# Altium PCB backscatter_tag_pcb.PcbDoc
Units mil, origin at the board's own origin, x right, y up, seen from the top; angles counter-clockwise.
Board outline 2400 x 1370 mil, 4 copper layers (Top Layer, Signal Layer 1, Signal Layer 2, Bottom Layer), stack 30.634 mil thick; 63 components, 49 nets, 352 pads, 0 vias.
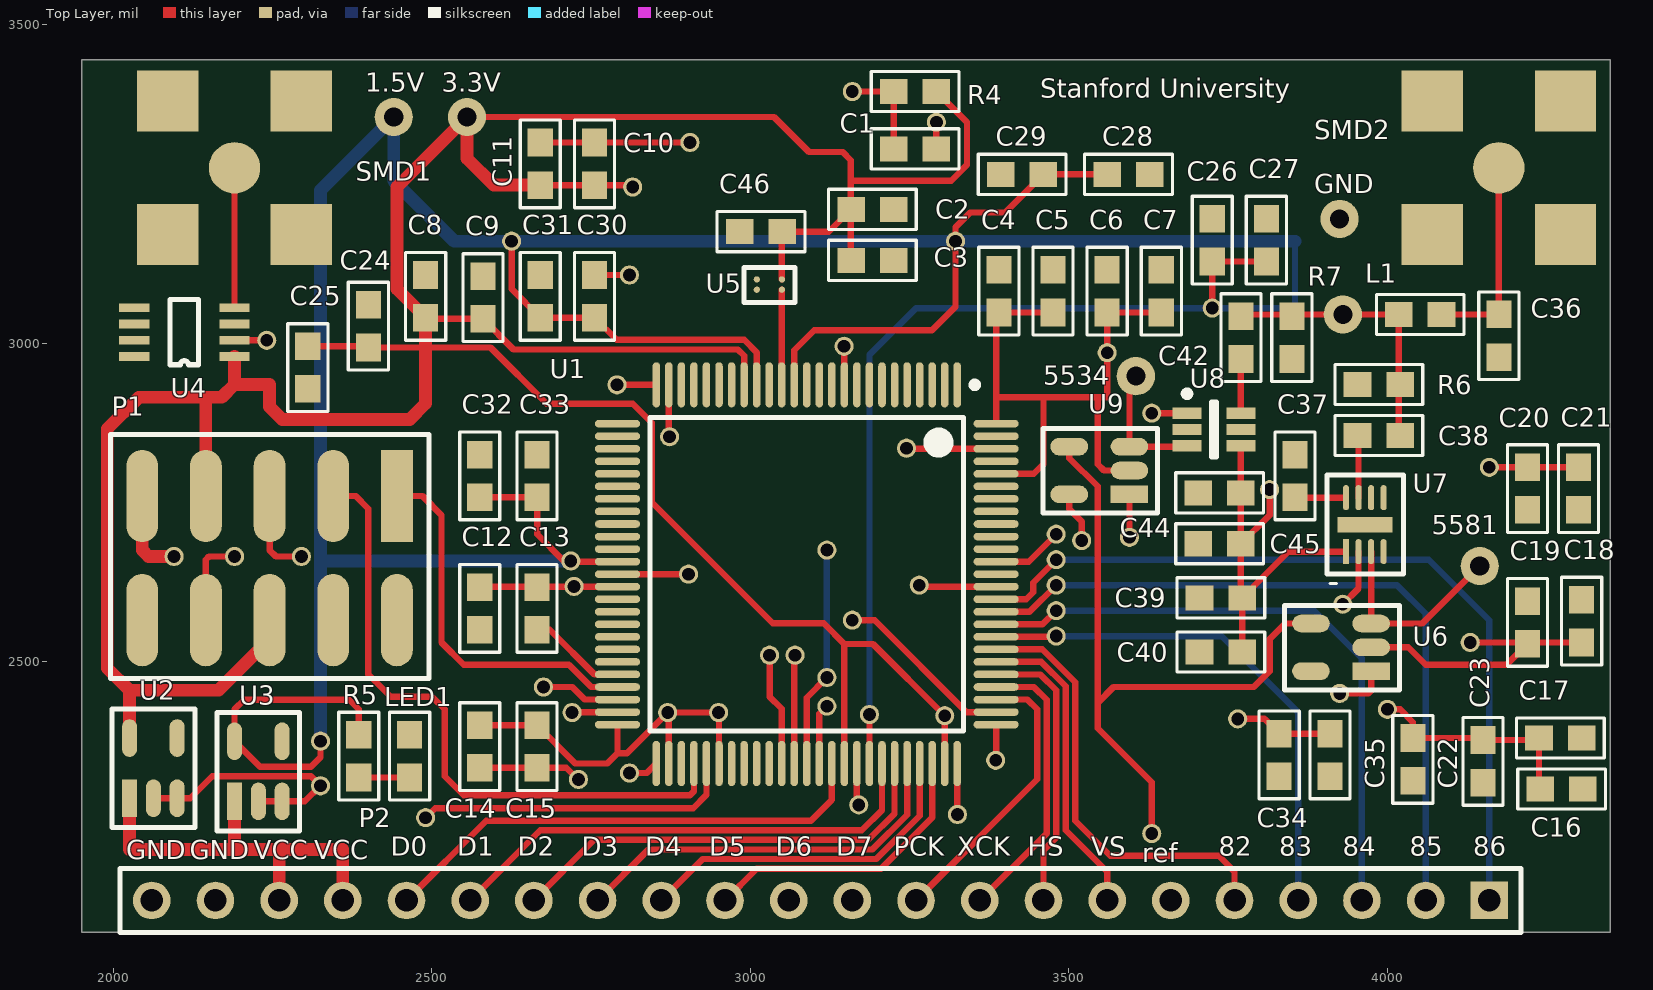
[diagram p0: Top Layer view]
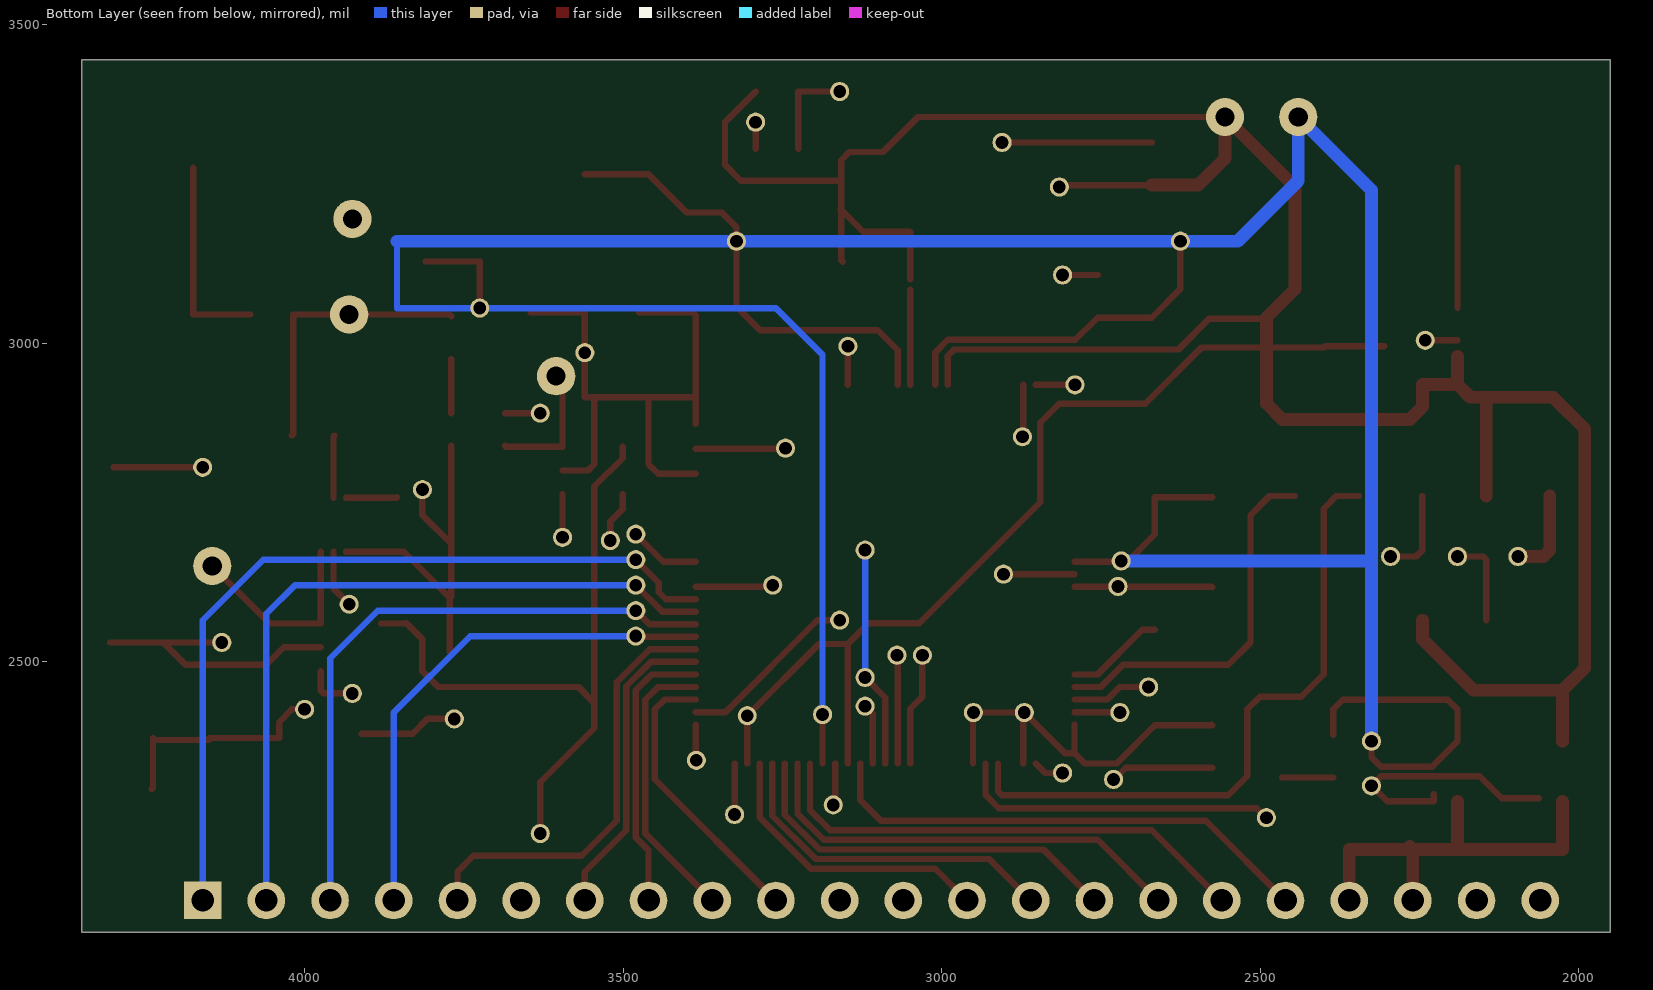
[diagram p1: Bottom Layer view, seen from below]
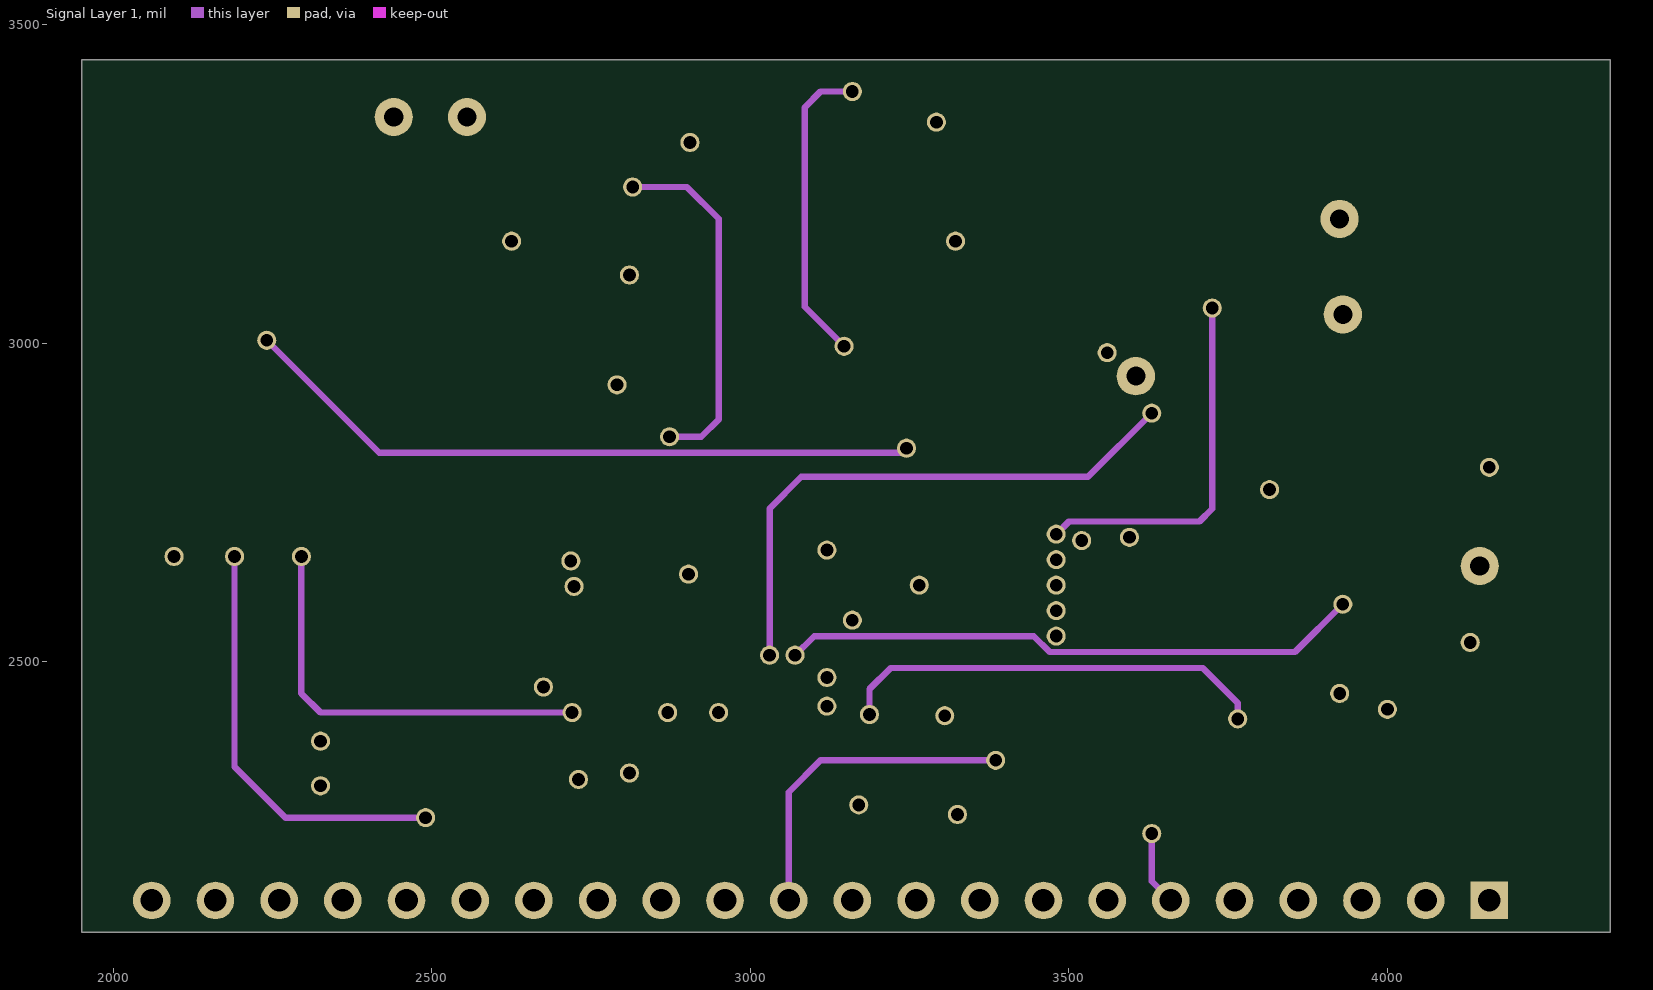
[diagram p2: Signal Layer 1]
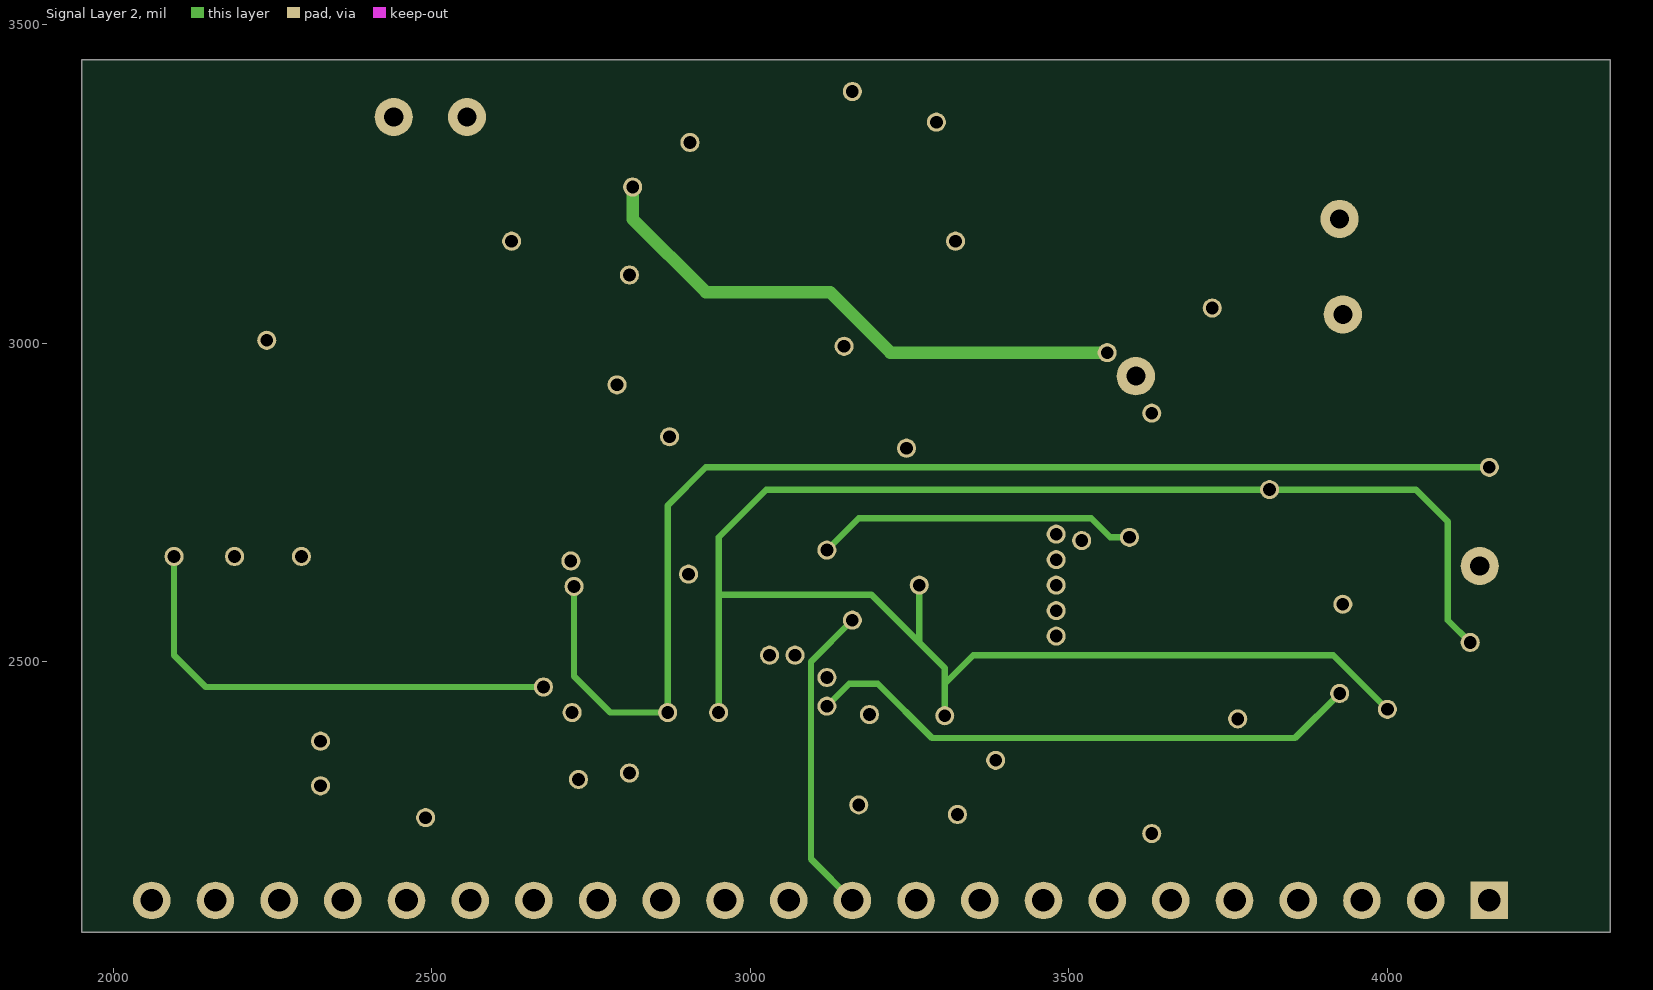
[diagram p3: Signal Layer 2]

## Layer stack, top to bottom
Top Solder: solder mask 0.4, Solder Resist, Dk 3.5
Top Layer: signal copper 1.4
Dielectric 1: core 10, FR-4, Dk 4.2
Signal Layer 1: signal copper 1.417
Dielectric 3: prepreg 5, Dk 4.2
Signal Layer 2: signal copper 1.417
Dielectric 2: core 10, Dk 4.2
Bottom Layer: signal copper 1.4
Bottom Solder: solder mask 0.4, Solder Resist, Dk 3.5

## Board outline
1950,2075 4350,2075 4350,3445 1950,3445

## Design rules (kind name [scope] priority, off if disabled: settings)
Clearance [All] p1: gap=5 ignorepadtopadclearanceinfootprint=FALSE except(6: THPad-THPad THPad-Via THPad-Fill THPad-Poly THPad-Region THPad-Text THPad-Hole Fill-Fill Fill-Poly Fill-Region Poly-Poly Poly-Region Region-Region)
PolygonConnect [All] p1: connectstyle=Relief reliefconductorwidth=10 reliefentries=4 polygonreliefangle="90 Angle" airgapwidth=10
RoutingVias [All] p1: holewidth=28 width=50 viastyle="Through Hole" minholewidth=28 minwidth=50 maxholewidth=28 maxwidth=50
SolderMaskExpansion [All] p1: expansion=4
Width [All] p1: maxlimit=20 minlimit=10 preferedwidth=10
30 further rules are at their usual default settings.

## Classes and differential pairs
component class envelope_detector: C36 C37 C38 C39 C40 C42 C44 C45 L1 R6 R7 SMD2 U6 U7 U8 U9
component class two_ant_fpga_board: C1 C2 C3 C4 C5 C6 C7 C8 C9 C10 C11 C12 C13 C14 C15 C16 C17 C18 C19 C20 C21 C22 C23 C24 C25 C26 C27 C28 C29 C30 C31 C32 C33 C34 C35 C46 LED1 P1 P2 R4 R5 SMD1 U1 U2 U3 U4 U5

## Components (designator, comment, footprint, x,y, rotation, side; value= is the part's Value field where it differs from the comment)
C1 "Cap" 0603 3291.93,3305 r180 top value=100nF
C2 "Cap" 0603 3225,3210 r180 top value=100nF
C3 "Cap" 0603 3225,3130 r180 top value=10nF
C4 "Cap" 0603 3390,3115 r270 top value=100nF
C5 "Cap" 0603 3475,3115 r270 top value=10nF
C6 "Cap" 0603 3560,3115 r270 top value=100nF
C7 "Cap" 0603 3645,3115 r270 top value=10nF
C8 "Cap" 0603 2490,3106.93 r270 top value=100nF
C9 "Cap" 0603 2580,3105 r270 top value=10nF
C10 "Cap" 0603 2755,3315 r270 top value=100nF
C11 "Cap" 0603 2670,3315 r270 top value=10nF
C12 "Cap" 0603 2575,2550 r90 top value=100nF
C13 "Cap" 0603 2665,2550 r90 top value=10nF
C14 "Cap" 0603 2575,2333.07 r90 top value=100nF
C15 "Cap" 0603 2665,2333.07 r90 top value=10nF
C16 "Cap" 0603 4306.93,2300 r180 top value=100nF
C17 "Cap" 0603 4305,2380 r180 top value=10nF
C18 "Cap" 0603 4305,2596.93 r270 top value=100nF
C19 "Cap" 0603 4220,2595 r270 top value=10nF
C20 "Cap" 0603 4220,2738.07 r90 top value=100nF
C21 "Cap" 0603 4300,2738.07 r90 top value=10nF
C22 "Cap" 0603 4040,2313.07 r90 top value=100nF
C23 "Cap" 0603 4150,2310 r90 top value=10nF
C24 "Cap" 0603 2400,3060 r270 top value=100nF
C25 "Cap" 0603 2305,2928.07 r90 top value=10nF
C26 "Cap" 0603 3725,3195 r270 top value=100nF
C27 "Cap" 0603 3810,3195 r270 top value=10nF
C28 "Cap" 0603 3626.93,3265 r180 top value=100nF
C29 "Cap" 0603 3393.07,3265 r0 top value=10nF
C30 "Cap" 0603 2755,3106.93 r270 top value=100nF
C31 "Cap" 0603 2670,3106.93 r270 top value=10nF
C32 "Cap" 0603 2575,2825 r270 top value=100nF
C33 "Cap" 0603 2665,2825 r270 top value=10nF
C34 "Cap" 0603 3830,2320 r90 top value=100nF
C35 "Cap" 0603 3910,2320 r90 top value=10nF
C36 "Cap" 0603 4175,2978.07 r90 top value=1nF
C37 "Cap" 0603 3855,2825 r270 top value=0.01uF
C38 "Cap" 0603 3953.07,2855 r0 top value=1nF
C39 "Cap" 0603 3705,2600 r0 top value=0.1uF
C40 "Cap" 0603 3705,2515 r0 top value=100pF
C42 "Cap" 0603 3770,2975 r90 top value=1nF
C44 "Cap" 0603 3703.07,2765 r0 top value=100nF
C45 "Cap" 0603 3703.07,2685 r0 top value=10nF
C46 "Cap" 0603 2983.07,3175 r0 top value=0.01uF
L1 "Ind" 0603 4018.07,3045 r0 top value=10nH
LED1 "LED" 0603 2465,2318.07 r90 top
P1 "header_10_pad" header_10_pad 2445,2759.88 r270 top
P2 "Header 22" HDR1X22 4160,2125 r180 top
R4 "Res" 0603 3225,3395 r0 top value=1k
R5 "Res" 0603 2385,2318.07 r90 top value=1k
R6 "Res" 0603 3953.07,2935 r0 top value=68O
R7 "Res" 0603 3850,2975 r90 top value=47O
SMD1 "SMD" SMD 2085.28,3380 r0 top
SMD2 "SMD" SMD 4070.28,3380 r0 top
U1 "AGLN250V2-VQ100" VQ100_N 3088.43,2637.24 r270 top
U2 "TPS76933" TPS73633 2025.2,2285.51 r90 top
U3 "TPS76915" TPS73633 2190,2280.51 r90 top
U4 "adg902" ADG902 2190,2978.82 r180 top
U5 "SiT8021" SiT8021 3010,3083.86 r90 top
U6 "NCS2200A" NCS2200 3974.49,2485 r180 top
U7 "LT5581" LT5581 3935,2672.68 r90 top
U8 "LT5534" LT5534 3727.68,2864.41 r0 top
U9 "NCS2200A" NCS2200 3595,2762.6 r180 top

## Footprints (in the part's own frame and the unit in brackets; to place one, negate y for a bottom-side part, rotate by r counter-clockwise, add the part's x,y. Pads: shape width x height; smd on the part's side, far side on the other; paste and mask are expansions set on the pad)
0603 [mm]
  rect 1.1x1 smd: 1(0,0) 2(1.7,0)
  silkscreen extent -0.9,-0.8 2.6,0.8
ADG902 [mm]
  rect 1.2x0.35 smd: 1(0,0) 2(0,-0.65) 3(0,-1.3) 4(0,-1.95) 5(4,-1.95) 6(4,-1.3) 7(4,-0.65) 8(4,0)
  silkscreen extent 1.43,-2.28 2.57,0.33
HDR1X22 [mm] "Connector; Header; 22 Position"
  rect 1.5x1.5 hole 0.9: 1(0,0)
  round 1.5 hole 0.9: 2(2.54,0) 3(5.08,0) 4(7.62,0) 5(10.16,0) 6(12.7,0) 7(15.24,0) 8(17.78,0) 9(20.32,0) 10(22.86,0) 11(25.4,0) 12(27.94,0) 13(30.48,0) 14(33.02,0) 15(35.56,0) 16(38.1,0) 17(40.64,0) 18(43.18,0) 19(45.72,0) 20(48.26,0) 21(50.8,0) 22(53.34,0)
  silkscreen extent -1.27,-1.27 54.61,1.27
header_10_pad [mm]
  rect 3.68x1.27 smd: 1(0,0)
  oval 3.68x1.27 smd: 2(4.95,0) 3(0,-2.54) 4(4.95,-2.54) 5(0,-5.08) 6(4.95,-5.08) 7(0,-7.62) 8(4.95,-7.62) 9(0,-10.16) 10(4.95,-10.16)
  silkscreen extent -2.45,-11.43 7.27,1.27
LT5534 [mm] "SOT23, 6-Leads, Body 2.00x2.55mm, Pitch 0.65mm, IPC Medium Density"
  rect 1.15x0.45 smd: 1(-1.075,0.65) 2(-1.075,0) 3(-1.075,-0.65) 4(1.075,-0.65) 5(1.075,0) 6(1.075,0.65)
  silkscreen extent -1.2,-1.1 0.1,1.55, body extent -0.67,-1.1 0.67,1.1, height 1.1
LT5581 [mm]
  rect 1x0.25 smd: 1(0,0)
  oval 1x0.25 smd: 2(0,-0.5) 3(0,-1) 4(0,-1.5) 5(2.15,-1.5) 6(2.15,-1) 7(2.15,-0.5) 8(2.15,0)
  rect 0.61x2.2 smd: 9(1.075,-0.762)
  silkscreen extent -1.27,-2.29 3.05,0.76
NCS2200 [mm]
  rect 1.5x0.7 smd: 1(0,0)
  oval 1.5x0.7 smd: 2(0,-0.95) 3(0,-1.9) 4(2.4,-1.9) 5(2.4,0)
  silkscreen extent -1.12,-2.63 3.45,0.75
SiT8021 [mm]
  round 0.25 smd: 1(0,0) 2(0,-1) 3(0.41,-1) 4(0.41,0)
  silkscreen extent -0.51,-1.52 0.89,0.51
SMD [mm]
  rect 2.44x2.44 smd: 1(0,-5.32) 1(0,0) 1(5.32,-5.32) 1(5.32,0)
  round 2.05 smd: 2(2.66,-2.66)
TPS73633 [mm]
  rect 1.5x0.6 smd: 1(0,0)
  oval 1.5x0.6 smd: 2(0,-0.95) 3(0,-1.9) 4(2.4,-1.9) 5(2.4,0)
  silkscreen extent -1.17,-2.6 3.55,0.7
VQ100_N [mm] "Thin QFP, 100-Leads, Body 14x14mm, Pitch 0.5mm, IPC Medium Density"
  oval 1.8x0.3 smd: 1(-7.55,6) 2(-7.55,5.5) 3(-7.55,5) 4(-7.55,4.5) 5(-7.55,4) 6(-7.55,3.5) 7(-7.55,3) 8(-7.55,2.5) 9(-7.55,2) 10(-7.55,1.5) 11(-7.55,1) 12(-7.55,0.5) 13(-7.55,0) 14(-7.55,-0.5) 15(-7.55,-1) 16(-7.55,-1.5) 17(-7.55,-2) 18(-7.55,-2.5) 19(-7.55,-3) 20(-7.55,-3.5) 21(-7.55,-4) 22(-7.55,-4.5) 23(-7.55,-5) 24(-7.55,-5.5) 25(-7.55,-6) 51(7.55,-6) 52(7.55,-5.5) 53(7.55,-5) 54(7.55,-4.5) 55(7.55,-4) 56(7.55,-3.5) 57(7.55,-3) 58(7.55,-2.5) 59(7.55,-2) 60(7.55,-1.5) 61(7.55,-1) 62(7.55,-0.5) 63(7.55,0) 64(7.55,0.5) 65(7.55,1) 66(7.55,1.5) 67(7.55,2) 68(7.55,2.5) 69(7.55,3) 70(7.55,3.5) 71(7.55,4) 72(7.55,4.5) 73(7.55,5) 74(7.55,5.5) 75(7.55,6)
  oval 0.3x1.8 smd: 26(-6,-7.55) 27(-5.5,-7.55) 28(-5,-7.55) 29(-4.5,-7.55) 30(-4,-7.55) 31(-3.5,-7.55) 32(-3,-7.55) 33(-2.5,-7.55) 34(-2,-7.55) 35(-1.5,-7.55) 36(-1,-7.55) 37(-0.5,-7.55) 38(0,-7.55) 39(0.5,-7.55) 40(1,-7.55) 41(1.5,-7.55) 42(2,-7.55) 43(2.5,-7.55) 44(3,-7.55) 45(3.5,-7.55) 46(4,-7.55) 47(4.5,-7.55) 48(5,-7.55) 49(5.5,-7.55) 50(6,-7.55) 76(6,7.55) 77(5.5,7.55) 78(5,7.55) 79(4.5,7.55) 80(4,7.55) 81(3.5,7.55) 82(3,7.55) 83(2.5,7.55) 84(2,7.55) 85(1.5,7.55) 86(1,7.55) 87(0.5,7.55) 88(0,7.55) 89(-0.5,7.55) 90(-1,7.55) 91(-1.5,7.55) 92(-2,7.55) 93(-2.5,7.55) 94(-3,7.55) 95(-3.5,7.55) 96(-4,7.55) 97(-4.5,7.55) 98(-5,7.55) 99(-5.5,7.55) 100(-6,7.55)
  silkscreen extent -7.67,-6.25 6.25,6.83, body extent -7,-7 7,7, height 1.2

## Part data
C1 C2 C3 C4 C5 C6 C7 C8 C9 C10 C11 C12 C13 C14 C15 C16 C17 C18 C19 C20 C21 C22 C23 C24 C25 C26 C27 C28 C29 C30 C31 C32 C33 C34 C35 C36 C37 C38 C39 C40 C42 C44 C45 C46: "Ceramic Capacitor (Surface Mount)", Manufacturer="Generic Ceramic Chip Cap (TBD)"
L1: "Inductor (Surface Mount)"
P2: "Header, 22-Pin", LatestRevisionDate=17-Jul-2002, LatestRevisionNote="Re-released for DXP Platform.", Publisher="Altium Limited"
R4 R5 R6 R7: "Chip Resistor (Surface Mount)", Manufacturer="Generic Chip Res (TBD)"
U1: "IGLOO nano Low-Power Flash 1.2 to 1.5V FPGA with Flash*Freeze, 68 User IOs, 250K System Gates, 1Kbit Flash ROM, 100-Pin TQFP, Commercial Grade", Code_JEDEC=MS-026-AED, ComponentLink1Description="IGLOO nano Datasheet", ComponentLink1URL=http://www.actel.com/documents/IGLOO_nano_DS.pdf, ComponentLink2Description="Package Mechanical Drawings", ComponentLink2URL=http://www.actel.com/documents/PckgMechDrwngs.pdf, ComponentLink3Description="IGLOO nano Documents", ComponentLink3URL=http://www.actel.com/products/igloonano/docs.aspx, ComponentLink4Description="Actel.com Home", ComponentLink4URL=http://www.actel.com/, DatasheetVersion="v0.8, Jan-2010", LatestRevisionDate=26-Feb-2010, LatestRevisionNote="Updated to datasheet version 0.8 Jan-2010.", PackageDescription="100-Pin Plastic Quad Flat Pack (VQ100)", PackageReference=VQ100, PackageVersion="ver11.2, Nov-2009", Published=29-May-2009, Publisher="Altium Limited"
U2 U3: "TPS73633"

## Free pads (board coordinates)
  round 30 hole 20: 10(2095,2665) 10(2190,2665) 10(2240.59,3004.41) 10(2295,2665) 10(2325,2305) 10(2325,2375) 10(2490,2255) 10(2625,3160) 10(2675,2460) 10(2718,2658) 10(2720,2420) 10(2723,2618) 10(2730,2315) 10(2790.51,2934.49) 10(2810,2325) 10(2810,3106.93) 10(2815,3245) 10(2870,2420) 10(2873,2853) 10(2902.76,2637.24) 10(2905,3315) 10(2950,2420) 10(3147,2995) 10(3160,3395) 10(3170,2275) 10(3245,2835) 10(3291.93,3346.93) 10(3322,3160) 10(3560,2985) 10(3725,3055) 10(4130,2530) 10(4160,2805) 11(3030,2510) 11(3070,2510) 11(3120,2430) 11(3120,2475) 11(3120,2675) 11(3160,2565) 11(3186.85,2416.85) 11(3265,2620) 11(3305,2415) 11(3325,2260) 11(3385,2345) 11(3480,2540) 11(3480,2580) 11(3480,2620) 11(3480,2660) 11(3480,2700) 11(3520,2690) 11(3595,2695) 11(3630,2230) 11(3630,2890) 11(3765,2410) 11(3815,2770) 11(3925,2450) 11(3930,2590) 11(4000,2425)
  round 60 hole 30: 12(2440,3355) 13(2555,3355) 14(3930,3045) 15(3925,3195) 16(3605,2948.07) 16(4145,2650)

## Nets (pads, with @x,y where several pads share a name; then routed paths per layer and width w, separated by ;. In a path a pad name is that pad's centre, name@x,y a point inside that pad or via, vN(x,y) a via of type N, cw(c..) or ccw(c..) an arc to the next point about the centre after c; other vN are vias at no path point)
comp_out_LT5534: pad.11@3120,2475 pad.11@3120,2675 pad.11@3595,2695 U1.63 U9.1 | length 923.8
  Top Layer w10: U1.63 3088.43,2443.43 pad.11@3120,2475 ; pad.11@3595,2695 U9.1
  Signal Layer 2 w10: pad.11@3120,2675 3170,2725 3535,2725 3565,2695 pad.11@3595,2695
  Bottom Layer w10: pad.11@3120,2475 pad.11@3120,2675
comp_out_LT5581: pad.11@3120,2430 pad.11@3925,2450 U1.64 U6.1 | length 1060.5
  Top Layer w10: U1.64 3108.11,2418.11 pad.11@3120,2430 ; pad.11@3925,2450 3970,2450 3974.49,2454.49 U6.1
  Signal Layer 2 w10: pad.11@3120,2430 3155,2465 3200,2465 3285,2380 3855,2380 pad.11@3925,2450
data: pad.10@2240.59,3004.41 pad.10@3245,2835 U1.98 U4.2 | length 1276.1
  Top Layer w10: U4.2 pad.10@2240.59,3004.41 ; pad.10@3245,2835 3245.91,2834.09 U1.98
  Signal Layer 1 w10: pad.10@2240.59,3004.41 2417,2828 3245,2828 pad.10@3245,2835
EN_LT5534: pad.11@3030,2510 pad.11@3630,2890 U1.61 U8.1 | length 1125.4
  Top Layer w10: pad.11@3030,2510 3030,2445 3049.06,2425.94 U1.61 ; pad.11@3630,2890 U8.1
  Signal Layer 1 w10: pad.11@3030,2510 3030,2740 3080,2790 3530,2790 pad.11@3630,2890
EN_LT5581: pad.11@3070,2510 pad.11@3930,2590 U1.62 U7.2 | length 1177.3
  Top Layer w10: U1.62 3068.74,2508.74 pad.11@3070,2510 ; pad.11@3930,2590 3954.68,2614.68 U7.2
  Signal Layer 1 w10: pad.11@3070,2510 3100,2540 3444.64,2540 3469.64,2515 3855,2515 pad.11@3930,2590
FPGA_D0: P2.18 U1.65 | length 790.4
  Top Layer w10: P2.18 2585,2250 3095,2250 3127.8,2282.8 U1.65
FPGA_D1: P2.17 U1.69 | length 778.6
  Top Layer w10: P2.17 2670,2235 3175,2235 3206.54,2266.54 U1.69
FPGA_D2: P2.16 U1.70 | length 701.4
  Top Layer w10: P2.16 2755,2220 3185,2220 3226.22,2261.22 U1.70
FPGA_D3: P2.15 U1.71 | length 622
  Top Layer w10: P2.15 2840,2205 3191.21,2205 3245.91,2259.69 U1.71
FPGA_D4: P2.14 U1.72 | length 542.6
  Top Layer w10: P2.14 2925,2190 3197.43,2190 3265.59,2258.16 U1.72
FPGA_D5: P2.13 U1.73 | length 464
  Top Layer w10: P2.13 3010,2175 3205,2175 3285.28,2255.28 U1.73
FPGA_D6: P2.12 pad.11@3385,2345 U1.76 | length 572
  Top Layer w10: pad.11@3385,2345 3385.67,2345.67 U1.76
  Signal Layer 1 w10: P2.12 3060,2295 3110,2345 pad.11@3385,2345
FPGA_D7: P2.11 pad.11@3160,2565 U1.77 | length 779.3
  Top Layer w10: pad.11@3160,2565 3195,2565 3339.29,2420.71 U1.77
  Signal Layer 2 w10: P2.11 3095,2190 3095,2500 pad.11@3160,2565
FPGA_HS: P2.8 U1.80 | length 442.9
  Top Layer w10: U1.80 3455.24,2479.76 3480,2455 3480,2223.79 3460,2203.79 P2.8
FPGA_PCK: P2.10 U1.78 | length 449.4
  Top Layer w10: P2.10 3450,2315 3450,2425 3434.61,2440.39 U1.78
FPGA_VS: P2.7 U1.81 | length 488.3
  Top Layer w10: U1.81 3456.76,2499.45 3495,2461.21 3495,2235 3560,2170 P2.7
FPGA_XCK: P2.9 U1.79 | length 446.1
  Top Layer w10: P2.9 3465,2230 3465,2440 3444.92,2460.08 U1.79
GND: C1.1 C2.1 C3.1 C4.1 C5.1 C6.1 C7.1 C8.1 C9.1 C10.1 C11.1 C12.1 C13.1 C14.1 C15.1 C16.1 C17.1 C18.1 C19.1 C20.1 C21.1 C22.1 C23.1 C24.1 C25.1 C26.1 C27.1 C28.1 C29.1 C30.1 C31.1 C32.1 C33.1 C34.1 C35.1 C36.1 C37.1 C39.1 C40.1 C44.1 C45.1 C46.1 LED1.2 P1.2 P1.10 P2.21 P2.22 pad.10@2325,2305 pad.10@2730,2315 pad.10@2790.51,2934.49 pad.10@2810,2325 pad.10@2810,3106.93 pad.10@2902.76,2637.24 pad.10@2905,3315 pad.10@3170,2275 pad.10@3291.93,3346.93 pad.11@3325,2260 pad.11@3520,2690 pad.15 R6.1 R7.1 SMD1.1 SMD2.1 U1.1 U1.9 U1.12 U1.25 U1.38 U1.46 U1.51 U1.67 U1.75 U1.88 U1.99 U2.2 U2.3 U3.2 U3.3 U4.3 U4.5 U4.6 U4.7 U4.8 U5.1 U5.4 U6.5 U7.4 U7.5 U7.6 U7.9 U8.2 U8.5 U9.5 | length 1503.3
  Top Layer w10: U2.2 U2.3 2120.51,2285.51 2155.04,2320.04 2223.75,2320.04 2223.79,2320 2310,2320 2325,2305 2300.51,2280.51 U3.3 U3.2 U3.2@2227.4,2291.67 ; C14.1 C15.1 2710.72,2333.07 2728.79,2315 pad.10@2730,2315 ; C13.1 2685,2550 2755.24,2479.76 U1.46 ; C11.1 C10.1 pad.10@2905,3315 ; C30.1 pad.10@2813.07,3106.93 ; pad.10@2790.51,2934.49 U1.25 ; U1.38 pad.10@2902.76,2637.24 ; pad.10@2810,2325 2837.2,2325 U1.51 ; U1.67 3167.17,2277.83 pad.10@3170,2275 ; C1.1 pad.10@3291.93,3346.93 ; U1.75 3324.65,2260.35 pad.11@3325,2260 ; U9.5 3500.51,2739.49 3520,2720 pad.11@3520,2690
NetC36_2: C36.2 L1.2 SMD2.2 | length 320.3
  Top Layer w10: L1.2 C36.2 SMD2.2
NetC37_2: C37.2 U7.8 | length 80.3
  Top Layer w10: C37.2 3855.75,2757.32 U7.8
NetC38_1: C38.1 U7.7 | length 98.3
  Top Layer w10: C38.1 3954.68,2853.39 U7.7
NetC38_2: C38.2 C42.2 L1.1 pad.14 R6.2 R7.2 | length 440.1
  Top Layer w10: C42.2 3773.07,3045 pad.14 L1.1 4018.07,2856.93 C38.2
NetC42_1: C42.1 U8.6 | length 85
  Top Layer w10: U8.6 C42.1
NetLED1_1: LED1.1 R5.1 | length 80
  Top Layer w10: R5.1 LED1.1
NetSMD1_2: SMD1.2 U4.4 | length 219.7
  Top Layer w10: U4.4 SMD1.2
OSC: U1.15 U5.2 | length 149.5
  Top Layer w10: U1.15 3049.41,2934.84 3049.41,3035 3049.37,3035.04 U5.2
P82: P2.5 U1.82 | length 691.3
  Top Layer w10: U1.82 3458.29,2519.13 3510,2467.43 3510,2250 3565,2195 3735,2195 3760,2170 P2.5
P83: P2.4 pad.11@3480,2540 U1.83 | length 819.5
  Top Layer w10: U1.83 3478.82,2538.82 pad.11@3480,2540
  Bottom Layer w10: pad.11@3480,2540 3740,2540 3860,2420 P2.4
P84: P2.3 pad.11@3480,2580 U1.84 | length 994.3
  Top Layer w10: U1.84 3458.5,2558.5 pad.11@3480,2580
  Bottom Layer w10: pad.11@3480,2580 3885,2580 3960,2505 P2.3
P85: P2.2 pad.11@3480,2620 U1.85 | length 1160.3
  Top Layer w10: U1.85 3438.19,2578.19 pad.11@3480,2620
  Bottom Layer w10: pad.11@3480,2620 4015,2620 4060,2575 P2.2
P86: P2.1 pad.11@3480,2660 U1.86 | length 1288.2
  Top Layer w10: U1.86 3432.87,2597.87 3443.94,2608.94 3443.94,2623.94 pad.11@3480,2660
  Bottom Layer w10: pad.11@3480,2660 4065,2660 4160,2565 P2.1
P90: U1.90
P91: U1.91
P92: U1.92
P93: U1.93
P94: U1.94
P95: U1.95
ref_voltage: P2.6 pad.11@3630,2230 U6.4 U9.4 | length 1194.6
  Top Layer w10: U9.4 3500.51,2819.49 3545,2775 3545,2435 ; pad.11@3630,2230 3630,2310.51 3545,2395.51 3545,2435 ; U6.4 3840.2,2559.8 3840,2560 3815,2535 3815,2485 3790,2460 3570,2460 3545,2435
  Signal Layer 1 w10: pad.11@3630,2230 3630,2155 P2.6
reset: C1.2 pad.10@3147,2995 pad.10@3160,3395 R4.1 U1.10 | length 701.7
  Top Layer w10: pad.10@3147,2995 3147.48,2994.52 U1.10 ; pad.10@3160,3395 R4.1 C1.2
  Signal Layer 1 w10: pad.10@3147,2995 3085,3057 3085,3370 3110,3395 pad.10@3160,3395
RSS_LT5534: pad.16@3605,2948.07 U8.3 U9.3 | length 205.8
  Top Layer w10: pad.16@3605,2948.07 3595,2938.07 U9.3 3683.94,2837.4 U8.3
RSS_LT5581: pad.16@4145,2650 U6.3 U7.3 | length 320.8
  Top Layer w10: U7.3 3974.37,2559.92 U6.3 4054.8,2559.8 pad.16@4145,2650
TCK: P1.1 U1.47 | length 587.5
  Top Layer w10: P1.1 2485.12,2759.88 2515,2730 2515,2530 2550,2495 2715,2495 2749.92,2460.08 U1.47
TDI: P1.9 pad.10@2095,2665 pad.10@2675,2460 U1.48 | length 1019
  Top Layer w10: pad.10@2675,2460 2720,2460 2739.61,2440.39 U1.48
  Top Layer w20: P1.9 2045,2675 2055,2665 pad.10@2095,2665
  Signal Layer 2 w10: pad.10@2095,2665 2095,2510 2145,2460 pad.10@2675,2460
TDO: P1.3 U1.54 | length 1021
  Top Layer w10: P1.3 2380.12,2759.88 2400,2740 2400,2480 2435,2445 2500,2445 2520,2425 2520,2320 2550,2290 2905,2290 2911.26,2296.26 U1.54
TMS: P1.5 pad.10@2295,2665 pad.10@2720,2420 U1.49 | length 862.9
  Top Layer w10: P1.5 2245,2675 2255,2665 pad.10@2295,2665 ; pad.10@2720,2420 2720.71,2420.71 U1.49
  Signal Layer 1 w10: pad.10@2295,2665 2295,2450 2325,2420 pad.10@2720,2420
TRST: P1.8 pad.10@2190,2665 pad.10@2490,2255 U1.55 | length 1310.1
  Top Layer w10: P1.8 2145,2660 2150,2665 pad.10@2190,2665 ; pad.10@2490,2255 2505,2270 2910,2270 2930.94,2290.94 U1.55
  Signal Layer 1 w10: pad.10@2190,2665 2190,2335 2270,2255 pad.10@2490,2255
VCC: P2.19 P2.20 U2.1 U3.1 | length 653.1
  Top Layer w20: U2.1@2025,2280.51 2025,2205 2100,2205 ; 2099.8,2205.2 2100,2205 ; U3.1 2190,2205 ; P2.20 2260,2205 ; 2264.8,2209.8 2260,2205 ; P2.19 2360,2205 2260,2205 ; 2100,2205 2190,2205 ; 2190,2205 2260,2205
VCC_1_5: C26.2 C27.2 C28.2 C29.2 C30.2 C31.2 C32.2 C33.2 C34.2 C35.2 pad.10@2325,2375 pad.10@2625,3160 pad.10@2718,2658 pad.10@3322,3160 pad.10@3725,3055 pad.11@3186.85,2416.85 pad.11@3480,2700 pad.11@3765,2410 pad.12 R5.2 U1.14 U1.17 U1.37 U1.68 U1.89 U3.5 | length 8159.9
  Top Layer w10: pad.10@2325,2375 2325,2350 2310,2335 2280.09,2335 2280.05,2335.04 2249.56,2335.04 2249.52,2335 2230,2335 U3.5 2190,2425 2205,2440 2370,2440 2385,2425 R5.2 ; C32.2 C33.2 2665,2700 2708.07,2656.93 U1.37 ; pad.10@2625,3160 2625,3085 C31.2 C30.2 2790,3005 2990,3005 3009.68,2985.32 U1.17 ; U1.14 3068.74,2988.74 3100,3020 3285,3020 3322,3057 3322,3160 3322,3182 3345,3205 3400,3205 C29.2 C28.2 ; U1.68 pad.11@3186.85,2416.85 ; U1.89 3436.93,2656.93 pad.11@3480,2700 ; pad.10@3725,3055 C26.2 C27.2 ; pad.11@3765,2410 3806.93,2410 C34.2 C35.2
  Signal Layer 1 w10: pad.11@3186.85,2416.85 3186.85,2456.85 3220,2490 3710,2490 3765,2435 pad.11@3765,2410 ; pad.11@3480,2700 3500,2720 3705,2720 3725,2740 pad.10@3725,3055
  Bottom Layer w10: pad.11@3186.85,2416.85 3186.85,2981.85 3260,3055 3725,3055 3855,3055 3855,3160
  Bottom Layer w20: pad.10@2325,2375 2325,2655 ; pad.10@2718,2658 2328,2658 2325,2655 ; 3855,3160 3322,3160 2625,3160 2535,3160 2440,3255 pad.12 2325,3240 2325,2655
VCC_3_3: C2.2 C3.2 C4.2 C5.2 C6.2 C7.2 C8.2 C9.2 C10.2 C11.2 C12.2 C13.2 C14.2 C15.2 C16.2 C17.2 C18.2 C19.2 C20.2 C21.2 C22.2 C23.2 C24.2 C25.2 C39.2 C40.2 C44.2 C45.2 C46.2 P1.6 P1.7 pad.10@2723,2618 pad.10@2815,3245 pad.10@2870,2420 pad.10@2873,2853 pad.10@2950,2420 pad.10@3560,2985 pad.10@4130,2530 pad.10@4160,2805 pad.11@3265,2620 pad.11@3305,2415 pad.11@3815,2770 pad.11@4000,2425 pad.13 R4.2 U1.18 U1.24 U1.39 U1.50 U1.52 U1.56 U1.66 U1.74 U1.87 U1.96 U1.100 U2.5 U4.1 U5.3 U6.2 U7.1 U8.4 U9.2 | length 15894.8
  Top Layer w10: C25.2 2398.07,2995 C24.2 2490,2993.07 2591.93,2993.07 2680,2905 2815,2905 2845,2875 2845,2750 3035,2560 3115,2560 3147.48,2527.52 ; C8.2 2491.93,3038.07 C9.2 2628.07,2990 2980,2990 2990,2980 U1.18 ; pad.13 3036.93,3355 3091.93,3300 3145,3300 3157.72,3287.28 3157.72,3255 ; C12.2 2575.63,2617.56 U1.39 ; C14.2@2576.02,2401.02 C14.2 C15.2 2725,2340 2775,2340 2791.18,2356.18 ; C11.2 C10.2 2811.93,3248.07 pad.10@2815,3245 ; U1.50 2791.18,2356.18 ; U1.52 2871.89,2418.11 pad.10@2870,2420 ; U1.24 2871.89,2854.11 pad.10@2873,2853 ; U1.56 2950.63,2419.37 2950,2420 pad.10@2870,2420 ; U5.3 3049.37,3174.37 C46.2 3123.07,3175 C2.2@3157.72,3209.65 ; U1.66 3147.48,2527.52 ; C3.2@3155,3127.64 3157.72,3130.35 C2.2@3157.72,3209.65 ; C2.2 C2.2@3157.72,3209.65 ; pad.11@3265,2620 3267.44,2617.56 U1.87 ; R4.2 3340,3346.93 3340,3280 3315,3255 3157.72,3255 ; U1.74 pad.11@3304.96,2414.96 ; pad.11@3305,2415 3192.48,2527.52 3147.48,2527.52 ; U1.96 3444.72,2794.72 3460,2810 3460,2915 ; U1.100 3385.67,2915 ; C5.2 C4.2 3385.67,3043.74 3385.67,2915 ; U9.2 3555,2800 3545,2810 3545,2915 ; C7.2 C6.2 3560,2985 3560,2915 3545,2915 ; U8.4 C44.2 C45.2 ; C40.2 C39.2 ; pad.11@3815,2770 3815,2730 C45.2 ; U7.1 3844.61,2672.68 C39.2 ; U6.2 4032.6,2522.4 4060,2495 4186.93,2495 C19.2 ; pad.11@4000,2425 4020,2425 4040,2405 C22.2 C23.2@4150,2380 ; pad.10@4130,2530 C18.2 ; C23.2 4235,2376.93 C17.2 4238.07,2301.93 C16.2 ; pad.10@4160,2805 C20.2 C21.2 ; 2791.18,2356.18 2806.18,2356.18 pad.10@2870,2420 ; C2.2@3157.72,3209.65 3157.72,3255 ; 3385.67,2915 3460,2915 ; 3460,2915 3545,2915 ; C45.2 3770,2601.93 C39.2
  Top Layer w20: U2.5@2025,2375 2025,2455 ; P1.7 2145,2915 ; U4.1 2190,2935 ; P1.6 2245,2535 2165,2455 2025,2455 ; C11.2 2596.93,3248.07 2555,3290 pad.13 2445,3245 2445,3085 C8.2 2490,2993.07 2490,2905 2465,2880 2265,2880 2245,2900 2245,2935 2190,2935 ; 2025,2455 1990,2490 1990,2865 2040,2915 2145,2915 ; 2145,2915 2170,2915 2190,2935
  Signal Layer 1 w10: pad.10@2815,3245 2900,3245 2950,3195 2950,2880 2923,2853 pad.10@2873,2853
  Signal Layer 2 w10: pad.10@2723,2618 2723,2477 2780,2420 2870,2420 2870,2745 2930,2805 pad.10@4160,2805 ; pad.10@2950,2420 2950,2605 ; pad.11@3265,2620 3265,2530 ; pad.11@3305,2415 3305,2465 ; pad.11@4000,2425 3915,2510 3350,2510 3305,2465 ; pad.10@4130,2530 4095,2565 4095,2720 4045,2770 3815,2770 3025,2770 2950,2695 2950,2605 ; 2950,2605 3190,2605 3265,2530 ; 3265,2530 3305,2490 3305,2465
  Signal Layer 2 w20: pad.10@2815,3245 2815,3195 2930,3080 3125,3080 3220,2985 pad.10@3560,2985
pads on no net: P1.4 U1.2 U1.3 U1.4 U1.5 U1.6 U1.7 U1.8 U1.11 U1.13 U1.16 U1.19 U1.20 U1.21 U1.22 U1.23 U1.26 U1.27 U1.28 U1.29 U1.30 U1.31 U1.32 U1.33 U1.34 U1.35 U1.36 U1.40 U1.41 U1.42 U1.43 U1.44 U1.45 U1.53 U1.57 U1.58 U1.59 U1.60 U1.97 U2.4 U3.4

## Silkscreen, mask and mechanical layers (free items; w line width, h text height)
Top Overlay:
  text "1.5V" at 2395,3395 h30
  text "3.3V" at 2515,3395 h30
  text "Stanford University" at 3455,3385 h30
  text "GND" at 3885,3235 h30
  text "5534" at 3460,2935 h30
  text "5581" at 4070,2700 h30
  text "D0" at 2435,2195 h30
  text "D1" at 2540,2195 h30
  text "D2" at 2635,2195 h30
  text "D3" at 2735,2195 h30
  text "D4" at 2835,2195 h30
  text "D5" at 2935,2195 h30
  text "D6" at 3040,2195 h30
  text "D7" at 3135,2195 h30
  text "PCK" at 3225,2195 h30
  text "XCK" at 3325,2195 h30
  text "HS" at 3435,2195 h30
  text "VS" at 3535,2195 h30
  text "82" at 3735,2195 h30
  text "83" at 3830,2195 h30
  text "84" at 3930,2195 h30
  text "85" at 4035,2195 h30
  text "86" at 4135,2195 h30
  text "GND" at 2020,2190 h30
  text "GND" at 2120,2190 h30
  text "VCC" at 2220,2190 h30
  text "VCC" at 2315,2190 h30
  text "ref" at 3615,2185 h30
Mechanical 1:
  the board outline again, w10